# Altium PCB S01-17676 PCBA.PcbDoc
Units mm, origin at the board's own origin, x right, y up, seen from the top; angles counter-clockwise.
Board outline 37.59 x 115.44 mm, 2 copper layers (Top Layer, Bottom Layer); 15 components, 10 nets, 81 pads, 2 vias.
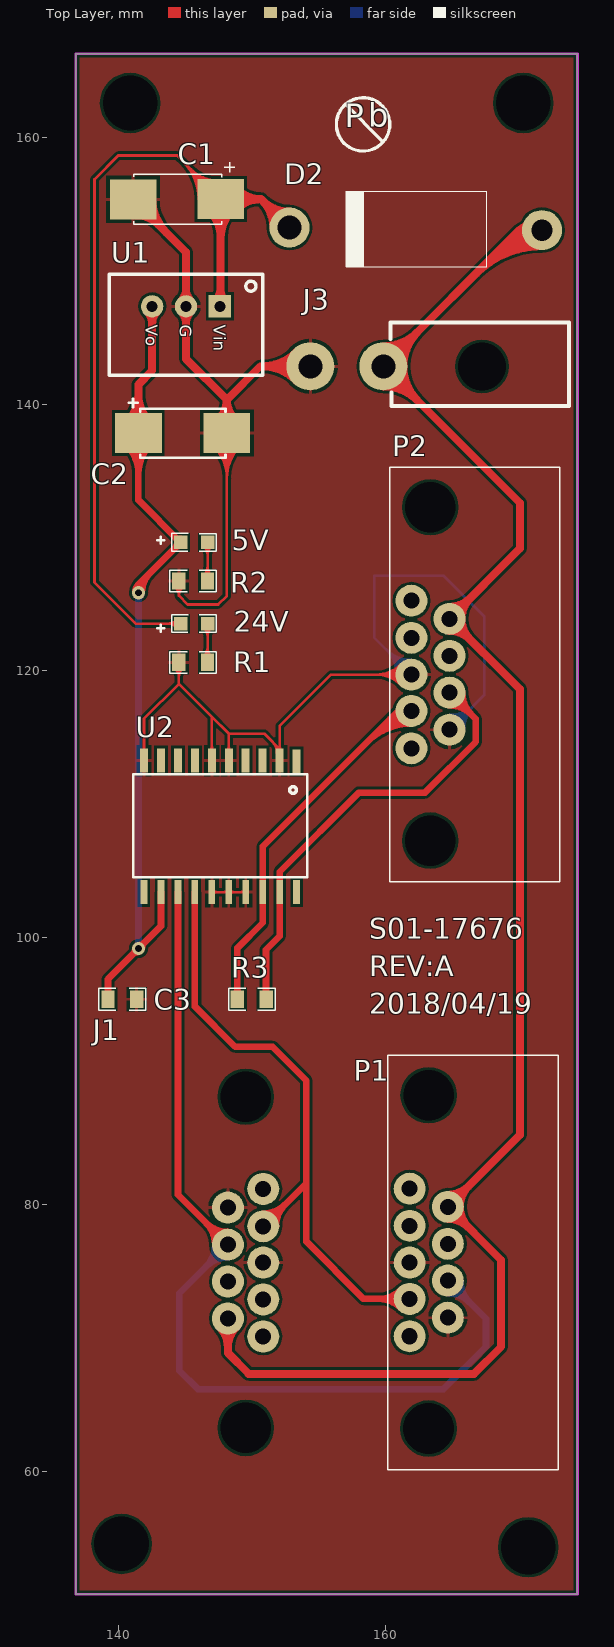
[diagram p0: Top Layer view]
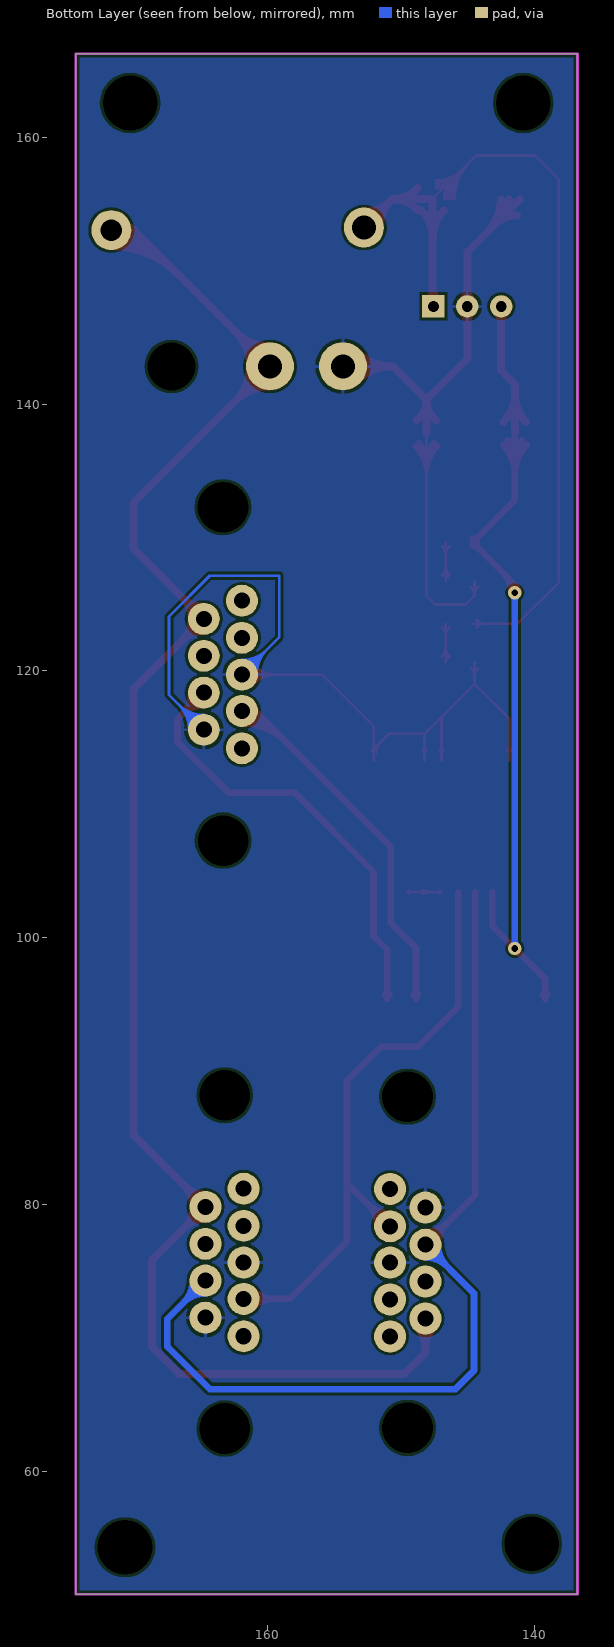
[diagram p1: Bottom Layer view, seen from below]
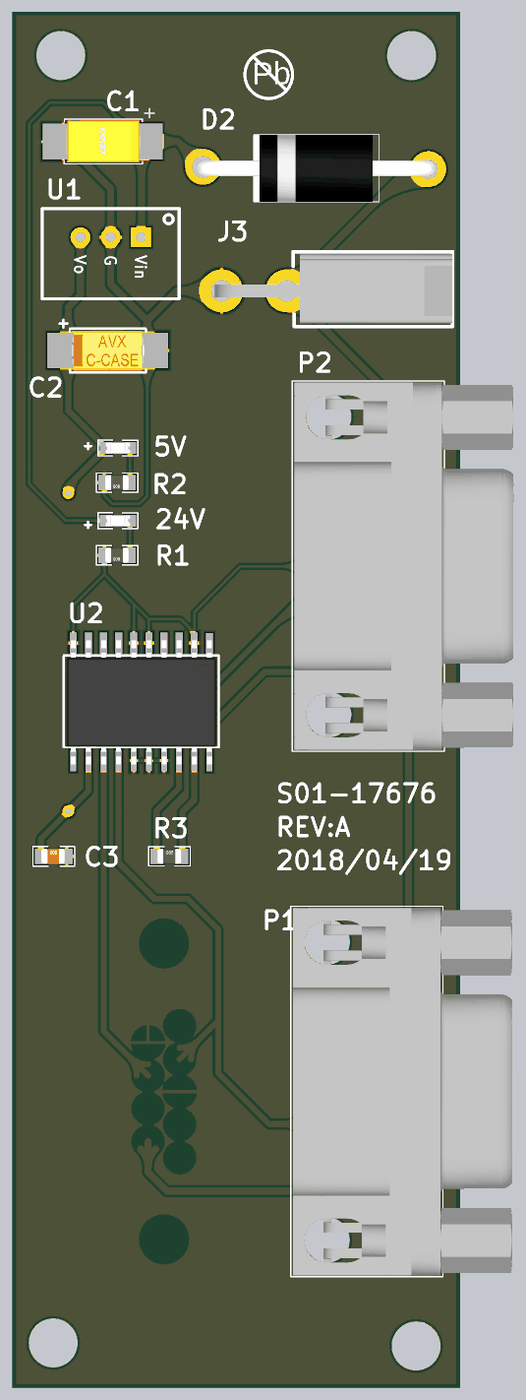
[diagram p2: 3D render of the assembled board from above, using the file's embedded part models]

## Layer stack, top to bottom
Top Solder: solder mask 0.0102, Solder Resist, Dk 3.5
Top Layer: signal copper 0.0356
Dielectric1: dielectric 0.32, FR-4, Dk 4.8
Bottom Layer: signal copper 0.0356
Bottom Solder: solder mask 0.0102, Solder Resist, Dk 3.5

## Board outline
136.779,50.8 136.779,166.243 174.371,166.243 174.371,50.8

## Design rules (kind name [scope] priority, off if disabled: settings)
AssemblyTestPointUsage AssemblyTestPointUsage_1 [All] p2:
AssemblyTestpoint AssemblyTestpoint_1 [All] p2: testpointundercomponent=TRUE minsize=1.016 maxsize=2.54 preferedsize=1.524 minholesize=0 maxholesize=1.016 preferedholesize=0.813 testpointgrid=0.025 usegrid=TRUE gridtolerance=0 allowsidetop=TRUE allowsidebottom=TRUE
Clearance [All] p1: gap=0.2
ComponentClearance ComponentClearance_1 [All] p2: gap=0.254 collisioncheckmode=3 verticalgap=0.254 showdistances=FALSE
DiffPairsRouting DiffPairsRouting_1 [All] p2: maxlimit=0.254 minlimit=0.254 mostfreqgap=0.254 toplayer_minwidth=0.381 toplayer_maxwidth=0.381 toplayer_prefwidth=0.381 bottomlayer_minwidth=0.381 bottomlayer_maxwidth=0.381 bottomlayer_prefwidth=0.381 maxuncoupledlength=12.7
FabricationTestPointUsage TestPointUsage [All] p2: valid=0 allowmultiple=FALSE
FabricationTestpoint Testpoint [All] p2: side=3 testpointundercomponent=TRUE minsize=1.016 maxsize=2.54 preferedsize=1.524 minholesize=0 maxholesize=1.016 preferedholesize=0.813 testpointgrid=0.025 allowsidetop=TRUE allowsidebottom=TRUE usegrid=TRUE gridtolerance=0
FanoutControl Fanout_LCC [IsLCC] p1: bgadir=Out bgaviamode=Centered fanoutstyle=Auto fanoutdirection=Alternating viagrid=0.025 // Fanout_LCC (Default Rule)
FanoutControl Fanout_BGA [IsBGA] p2: bgadir=Out bgaviamode=Centered fanoutstyle=Auto fanoutdirection=Alternating viagrid=0.025 // Fanout_BGA (Default Rule)
FanoutControl Fanout_Small [(CompPinCount < 5)] p3: bgadir=Out bgaviamode=Centered fanoutstyle=Auto fanoutdirection=OutThenIn viagrid=0.025 // Fanout_Small (Default Rule)
FanoutControl Fanout_SOIC [IsSOIC] p4: bgadir=Out bgaviamode=Centered fanoutstyle=Auto fanoutdirection=Alternating viagrid=0.025 // Fanout_SOIC (Default Rule)
FanoutControl Fanout_BGA_1 [IsBGA] p6: bgadir=Out bgaviamode=Centered fanoutstyle=Auto fanoutdirection=Alternating viagrid=0.025 // Fanout_BGA (Default Rule)
FanoutControl Fanout_LCC_1 [IsLCC] p7: bgadir=Out bgaviamode=Centered fanoutstyle=Auto fanoutdirection=Alternating viagrid=0.025 // Fanout_LCC (Default Rule)
FanoutControl Fanout_SOIC_1 [IsSOIC] p8: bgadir=Out bgaviamode=Centered fanoutstyle=Auto fanoutdirection=Alternating viagrid=0.025 // Fanout_SOIC (Default Rule)
FanoutControl Fanout_Small_1 [(CompPinCount < 5)] p9: bgadir=Out bgaviamode=Centered fanoutstyle=Auto fanoutdirection=OutThenIn viagrid=0.025 // Fanout_Small (Default Rule)
FanoutControl Fanout_Default_1 [All] p10: bgadir=Out bgaviamode=Centered fanoutstyle=Auto fanoutdirection=Alternating viagrid=0.025 // Fanout_Default (Default Rule)
Height Height_1 [All] p2: minheight=0 maxheight=25.4 prefheight=12.7
HoleSize [All] p1: absolutevalues=TRUE maxlimit=6 minlimit=0.025 maxpercent=80.000 minpercent=20.000
HoleSize HoleSize_1 [All] p2: absolutevalues=TRUE maxlimit=2.54 minlimit=0.025 maxpercent=80.000 minpercent=20.000
HoleToHoleClearance HoleToHoleClearance_1 [All] p2: gap=0.254 allowstackedmicrovias=TRUE
LayerPairs LayerPairs_1 [All] p2: enforce=TRUE
MinimumSolderMaskSliver MinimumSolderMaskSliver_1 [All] p2: minsoldermaskwidth=0.254
NetAntennae NetAntennae_1 [All] p2: netantennaetolerance=0
PasteMaskExpansion PasteMaskExpansion_1 [All] p2: expansion=0
PlaneClearance PlaneClearance_1 [All] p2: clearance=0.508
PolygonConnect [All] p1: connectstyle=Relief reliefconductorwidth=0.254 reliefentries=4 polygonreliefangle="90 Angle" airgapwidth=0.254
PolygonConnect PolygonConnect_1 [All] p2: connectstyle=Relief reliefconductorwidth=0.254 reliefentries=4 polygonreliefangle="90 Angle" airgapwidth=0.254
RoutingPriority RoutingPriority_1 [All] p2: routingpriority=0
RoutingTopology RoutingTopology_2 [All] p1: topology=Shortest
RoutingTopology [All] p2: topology=Shortest
RoutingTopology RoutingTopology_1 [All] p3: topology=Shortest
RoutingVias [All] p1: holewidth=0.6 width=1 viastyle="Through Hole" minholewidth=0.711 minwidth=1.27 maxholewidth=0.711 maxwidth=1.27
ShortCircuit ShortCircuit_1 [All] p2: allowed=FALSE
SilkToSilkClearance SilkToSilkClearance_1 [All] p2: silktosilkclearance=0.254
SilkToSolderMaskClearance SilkscreenOverComponentPads [IsPad] p2: minsilkscreentomaskgap=0.254 clearancetoexposedcopper=TRUE
SolderMaskExpansion [All] p1: expansion=0.102
SolderMaskExpansion SolderMaskExpansion_1 [All] p2: expansion=0.102
UnRoutedNet UnRoutedNet_1 [All] p2:
Width [All] p1: maxlimit=0.6 minlimit=0.2 preferedwidth=0.3
24 further rules are at their usual default settings.

## Components (designator, comment, footprint, x,y, rotation, side; value= is the part's Value field where it differs from the comment)
5V "0805 LED" "0805 LED" 145.679,129.032 r90 top (schematic designator L2)
24V "0805 LED" "0805 LED" 145.679,122.936 r90 top (schematic designator L1)
C1 "T491D106K035AT" T491D106K035AT 141.224,155.321 r0 top
C2 "T491C226K010AT" T491C226K010AT 141.605,136.144 r0 top
C3 "0.01uF" "0805 Capacitor" 140.208,96.139 r270 top
D2 "SB560" SB560 171.704,153.035 r180 top
J1 "5504F1-09P-02A-03(male)" 5504F1-09P-02A-03 131.572,91.059 r270 top
J3 "39-30-0020" 39-30-0020 162.433,147.955 r270 top
P1 "5504F1-09S-02A-03(female)" 5504F1-09S-02A-03 178.689,60.198 r90 top
P2 "5504F1-09S-02A-03(female)" 5504F1-09S-02A-03 178.816,104.267 r90 top (schematic designator J2)
R1 "3.3K" "0805 Resistor" 145.669,119.888 r90 top
R2 "698" "0805 Resistor" 145.669,125.984 r90 top
R3 "120" "0805 Resistor" 149.86,96.139 r270 top
U1 "ZY7805S-500" ZY78xxS-500 145.034,147.32 r180 top
U2 "AMIS42770ICAW1RG" AMIS42770ICAW1RG 153.67,112.268 r180 top

## Footprints (in the part's own frame and the unit in brackets; to place one, negate y for a bottom-side part, rotate by r counter-clockwise, add the part's x,y. Pads: shape width x height; smd on the part's side, far side on the other; paste and mask are expansions set on the pad)
39-30-0020 [mm] "线至板连接器, 4.2 mm, 2 触点, 针座, Mini-Fit Jr. 5569系列, 通孔安装"
  round 3.6 hole 1.8: 1(5.13,-2.61) 2(5.13,-8.08)
  round 0 hole 3.6: 3(5.14,4.78)
  silkscreen extent 1.85,-2.07 8.12,11.31, body extent 2.05,-8.64 7.85,11.3, height 12.4
"0805 Capacitor" [mm]
  rect 1.3x1 smd: 1(0.75,1.125) 2(0.75,-1.025)
  silkscreen extent -0.08,-1.7 1.58,1.8, body extent 0.12,-1.02 1.37,0.98, height 0.78
"0805 LED" [mm]
  rect 1x1 smd: 1(0.6,1.05) 2(0.6,-0.975)
  silkscreen extent -0.06,-1.63 1.27,1.71, body extent 0.14,-0.98 1.05,1.08, height 0.85
"0805 Resistor" [mm]
  rect 1.3x1 smd: 1(0.75,1.175) 2(0.75,-0.975)
  silkscreen extent -0.06,-1.64 1.56,1.85, body extent 0.13,-0.9 1.38,1.1, height 0.78
5504F1-09P-02A-03 [mm] "连接器, D sub, 堆叠式, 直角, PCB Mount D Sub系列, DE, 插头, 9 触点, 金属主体, 焊接"
  round 2.4 hole 1.2: 1(9.89,19.25) 2(12.69,19.25) 3(15.41,19.25) 4(18.17,19.25) 5(20.95,19.25) 6(11.29,16.6) 7(14.07,16.6) 8(16.83,16.6) 9(19.6,16.6)
  round 0 hole 3.8: 10(2.98,17.94) 11(27.8,17.94)
  body extent 0.01,0.1 30.81,20.98, height 14.27
5504F1-09S-02A-03 [mm] "D-Sub 连接器, 9 触点, 插座, DE, AMPLIMITE HD-20系列, 金属主体, 焊接"
  round 2.4 hole 1.2: 1(9.93,16.89) 2(12.73,16.89) 3(15.45,16.89) 4(18.21,16.89) 5(20.99,16.89) 6(11.32,14.03) 7(14.1,14.03) 8(16.86,14.03) 9(19.63,14.03)
  round 0 hole 3.8: 10(3.01,15.48) 11(28,15.47)
  silkscreen extent -0.07,5.76 31,18.53, body extent 0.05,-0.06 30.85,18.36, height 12.75
AMIS42770ICAW1RG [mm]
  rect 0.6x1.8 smd: 1(0.35,-0.95) 2(1.62,-1) 3(2.89,-1) 4(4.16,-1) 5(5.43,-1) 6(6.7,-1) 7(7.97,-1) 8(9.24,-1) 9(10.51,-1) 10(11.78,-1)
  rect 0.5x1.8 smd: 11(11.79,8.85) 12(10.51,8.85) 13(9.24,8.85) 14(7.97,8.85) 15(6.7,8.85) 16(5.43,8.85) 17(4.16,8.85) 18(2.89,8.85) 19(1.61,8.85) 20(0.35,8.85)
  silkscreen extent -0.44,0.03 12.58,7.73, body extent -0.23,-1.24 12.37,9.16, height 2.6
SB560 [mm] "肖特基整流器, 60 V, 5 A, 单, DO-201AD, 2 引脚, 670 mV"
  round 3 hole 1.6: 1(-0.01,0)
  round 3 hole 1.8: 2(18.92,-0.19)
  silkscreen extent 4.12,-2.92 14.67,2.74, body extent -0.66,-2.89 19.48,2.75, height 7.82
T491C226K010AT [mm] "表面贴装钽电容, 22 μF, 10 V, T491 系列, ± 10%, 2312 [6032 公制]"
  rect 3.5x3 smd: 1(-0.14,1.67) 2(6.49,1.68)
  silkscreen extent -0.86,-0.16 6.39,4.26, body extent 0.14,-0.01 6.24,3.34, height 2.7
T491D106K035AT [mm]
  rect 3.5x3 smd: 1(6.41,0.04) 2(-0.15,0.02)
  silkscreen extent -0.1,-1.86 7.47,2.81, body extent 0.03,-1.71 6.33,1.79, height 2.81
ZY78xxS-500 [mil]
  rect 66x66 hole 32: 1(-100,0)
  round 66 hole 32: 2(0,0) 3(100,0)
  silkscreen extent -227,-94 226,203

## Part data
C1: "表面贴装钽电容, 10 μF, 35 V, T491 系列, ± 10%, 2917 [7343 公制]"
C2: "表面贴装钽电容, 22 μF, 10 V, T491 系列, ± 10%, 2312 [6032 公"
C3: library part "0805 Capacitor"
D2: "肖特基二极管与整流器 5a/60V"
J1: library part 5504F1-09P-02A-03, "连接器, D sub, 堆叠式, 直角, PCB Mount D Sub系列, DE, 插头, 9 触点, 金属主体, 焊接"
J3: "线至板连接器, 4.2 mm, 2 触点, 针座, Mini-Fit Jr. 5569系列, 通孔安装"
P1 P2: library part 5504F1-09S-02A-03, "D-Sub 连接器, 9 触点, 插座, DE, AMPLIMITE HD-20系列, 金属主体, 焊接"
R1 R2 R3: library part "0805 Resistor"
U1: library part ZY78xxS-500
U2: "CAN REPEATER"

## Free pads (board coordinates)
  round 1.8 hole 4.1: 51(170.685,54.312) 52(140.205,54.566) 53(140.843,162.56) 54(170.307,162.56)

## Via types
v1: diameter 1, hole 0.5, Top Layer to Bottom Layer, 2 vias

## Nets (pads, with @x,y where several pads share a name; then routed paths per layer and width w, separated by ;. In a path a pad name is that pad's centre, name@x,y a point inside that pad or via, vN(x,y) a via of type N, cw(c..) or ccw(c..) an arc to the next point about the centre after c; other vN are vias at no path point)
CANGND: C1.2 C2.2 C3.1 J1.3 J1.6 J3.2 P1.3 P1.6 P2.3 P2.6 R1.1 R2.1 U1.2 U2.2 U2.5 U2.6 U2.10 U2.15 U2.16 U2.17 | length 198.5
  Top Layer w0.2: U2.10@141.749,114.009 ccw(c141.407,114.351) 141.89,114.351 ccw(c142.373,114.351) U2.10@142.031,114.009 ; U2.10 141.89,116.427 144.494,119.031 ; R1.1@144.211,120.205 cw(c143.528,119.522) 144.494,119.522 cw(c145.46,119.522) R1.1@144.777,120.205 ; R2.1@144.215,126.298 cw(c143.568,125.635) 144.494,125.635 ; R1.1 144.494,119.031 ; R2.1 144.494,125.635 ; R2.1@144.773,126.298 ccw(c145.42,125.635) 144.494,125.635 ; U2.6@146.829,114.009 ccw(c146.487,114.351) 146.97,114.351 ccw(c147.453,114.351) U2.6@147.111,114.009 ; U2.15 U2.16 U2.17 ; U2.6 146.97,116.555 ; U2.15@147.076,103.312 cw(c147.332,103.056) 147.332,103.418 cw(c147.332,103.78) U2.15@147.076,103.524 ; C2.2@147.105,136.834 cw(c144.715,134.444) 148.095,134.444 cw(c151.475,134.444) C2.2@149.085,136.834 ; C2.2@147.246,136.975 cw(c145.198,134.927) 148.095,134.927 cw(c150.992,134.927) C2.2@148.944,136.975 ; C2.2@147.388,137.117 cw(c145.681,135.41) 148.095,135.41 cw(c150.509,135.41) C2.2@148.802,137.117 ; C2.2@147.529,137.258 cw(c146.164,135.893) 148.095,135.893 cw(c150.026,135.893) C2.2@148.661,137.258 ; C2.2 148.095,125.616 147.447,124.968 145.161,124.968 144.494,125.635 ; U2.5@148.099,114.009 ccw(c147.757,114.351) 148.24,114.351 ccw(c148.723,114.351) U2.5@148.381,114.009 ; U2.16@148.134,103.312 ccw(c147.878,103.056) 147.878,103.418 ccw(c147.878,103.78) U2.16@148.134,103.524 ; U2.5 148.24,115.285 ; U2.16@148.346,103.312 cw(c148.602,103.056) 148.602,103.418 cw(c148.602,103.78) U2.16@148.346,103.524 ; U2.17@149.404,103.312 ccw(c149.148,103.056) 149.148,103.418 ccw(c149.148,103.78) U2.17@149.404,103.524 ; 151.515,114.677 cw(c150.706,113.868) U2.2@151.85,113.868 ; 151.856,114.336 cw(c151.389,113.868) U2.2@152.05,113.868 ; U2.2@151.909,114.009 ccw(c151.567,114.351) 152.05,114.351 ccw(c152.533,114.351) U2.2@152.191,114.009 ; U2.2 U2.2@152.05,114.142 ; P2.3@161.148,118.939 ccw(c159.27,117.061) 159.27,119.717 ccw(c159.27,122.373) P2.3@161.148,120.495 ; P2.3@161.29,119.081 ccw(c159.753,117.544) 159.753,119.717 ccw(c159.753,121.89) P2.3@161.29,120.353 ; P2.3@161.431,119.222 ccw(c160.236,118.027) 160.236,119.717 ccw(c160.236,121.407) P2.3@161.431,120.212 ; P2.3@161.572,119.363 ccw(c160.719,118.51) 160.719,119.717 ccw(c160.719,120.924) P2.3@161.572,120.071 ; P2.3 155.912,119.717 152.05,115.855 U2.2@152.05,114.142 ; 144.494,119.031 146.97,116.555 ; 146.97,116.555 148.24,115.285 ; 148.24,115.285 150.907,115.285 U2.2@152.05,114.142
  Top Layer w0.6: C1.2 145.034,151.381 U1.2 145.034,143.383 148.095,140.322 ; C1.2@141.324,154.141 cw(c141.324,151.847) 142.946,153.469 ; C1.2@141.924,155.341 ccw(c143.976,155.341) C1.2@142.525,153.89 ; C1.2@142.524,155.341 ccw(c146.025,155.341) 143.549,152.866 ; U1.2@144.653,146.939 cw(c143.735,146.021) 145.034,146.021 cw(c146.333,146.021) U1.2@145.415,146.939 ; U1.2@144.653,147.701 ccw(c143.735,148.619) 145.034,148.619 ccw(c146.333,148.619) U1.2@145.415,147.701 ; C2.2@147.345,138.761 ccw(c146.095,140.322) 148.095,140.322 ; C2.2 148.095,140.322 ; C2.2@148.845,138.761 cw(c150.095,140.322) 148.095,140.322 ; J3.2@153.292,141.764 ccw(c150.732,139.204) 150.732,142.825 ccw(c150.732,146.446) J3.2@153.292,143.886 ; J3.2@153.717,142.189 ccw(c152.18,140.652) 152.18,142.825 ccw(c152.18,144.998) J3.2@153.717,143.461 ; J3.2 150.598,142.825 148.095,140.322
  Bottom Layer w0.2: P2.3@160.826,119.717 ccw(c158.17,119.717) 160.048,121.595 ccw(c161.926,123.473) P2.3@161.926,120.817 ; P2.3@161.026,119.717 ccw(c158.853,119.717) 160.39,121.253 ccw(c161.926,122.79) P2.3@161.926,120.617 ; P2.3@161.226,119.717 ccw(c159.536,119.717) 160.731,120.912 ccw(c161.926,122.107) P2.3@161.926,120.417 ; P2.3@161.426,119.717 ccw(c160.219,119.717) 161.072,120.571 ccw(c161.926,121.424) P2.3@161.926,120.217 ; P2.3 159.131,122.512 159.131,127.127 164.338,127.127 167.386,124.079 167.386,118.187 P2.6 ; P2.6@164.786,116.087 ccw(c164.786,117.294) 165.64,116.441 ccw(c166.493,115.587) P2.6@165.286,115.587 ; P2.6@164.786,116.287 ccw(c164.786,117.977) 165.981,116.782 ccw(c167.176,115.587) P2.6@165.486,115.587 ; P2.6@164.786,116.487 ccw(c164.786,118.66) 166.322,117.123 ccw(c167.859,115.587) P2.6@165.686,115.587 ; P2.6@164.786,116.687 ccw(c164.786,119.343) 166.664,117.465 ccw(c168.542,115.587) P2.6@165.886,115.587
CANV+: D2.1 J1.9 J3.1 P1.9 P2.9 | length 178.4
  Top Layer w0.6: J1.9@147.536,70.823 cw(c145.999,69.286) 148.172,69.286 cw(c150.345,69.286) J1.9@148.808,70.823 ; J1.9 148.172,68.871 149.733,67.31 166.624,67.31 168.656,69.342 168.656,75.831 P1.9 170.053,85.222 170.053,118.63 P2.9 170.053,129.164 170.053,132.595 J3.1 170.033,153.035 ; J3.1@159.823,141.325 cw(c159.823,137.704) 162.384,140.264 cw(c164.944,142.825) 161.323,142.825 cw(c164.944,142.825) 162.384,145.386 cw(c159.823,147.946) J3.1@159.823,144.325 ; J3.1@159.823,141.925 cw(c159.823,139.752) 161.359,141.289 cw(c162.896,142.825) 160.723,142.825 cw(c162.896,142.825) 161.359,144.361 cw(c159.823,145.898) J3.1@159.823,143.725 ; P1.9@164.659,78.928 cw(c164.659,76.755) 166.195,78.292 cw(c167.732,79.828) 165.559,79.828 cw(c167.732,79.828) 166.195,81.364 cw(c164.659,82.901) P1.9@164.659,80.728 ; P2.9@164.786,122.997 cw(c164.786,120.824) 166.322,122.361 cw(c167.859,123.897) 165.686,123.897 cw(c167.859,123.897) 166.322,125.433 cw(c164.786,126.97) P2.9@164.786,124.797 ; 166.796,149.798 cw(c171.714,144.88) D2.1@171.714,151.835 ; 167.82,150.822 cw(c171.714,146.928) D2.1@171.714,152.435 ; 168.844,151.846 cw(c171.714,148.977) D2.1 170.033,153.035 ; 169.869,152.871 cw(c171.714,151.025) D2.1@171.714,153.635 ; D2.1@170.579,152.645 ccw(c170.033,152.458) 170.033,153.035 ; D2.1@170.579,153.425 cw(c170.033,153.612) 170.033,153.035
NetC1_1: 24V.1 C1.1 D2.2 U1.1 | length 98.8
  Top Layer w0.2: 24V.1@144.346,123.253 ccw(c143.663,122.57) 143.663,123.536 ccw(c143.663,124.502) 24V.1@144.346,123.819 ; 24V.1 141.259,123.536 138.176,126.619 138.176,156.845 139.954,158.623 144.372,158.623 C1.1 ; 144.817,158.178 cw(c142.001,155.361) C1.1@145.984,155.361 ; 145.159,157.836 cw(c142.683,155.361) C1.1@146.184,155.361 ; 145.421,157.574 ccw(c147.384,159.537) C1.1@147.384,156.761 ; 145.5,157.495 cw(c143.366,155.361) C1.1@146.384,155.361 ; 145.762,157.233 ccw(c147.384,158.855) C1.1@147.384,156.561 ; 145.842,157.153 cw(c144.049,155.361) C1.1@146.584,155.361 ; 146.104,156.891 ccw(c147.384,158.172) C1.1@147.384,156.361 ; C1.1@146.183,156.812 cw(c144.732,155.361) C1.1@146.784,155.361 ; C1.1@146.445,156.55 ccw(c147.384,157.489) C1.1@147.384,156.161
  Top Layer w0.6: C1.1@146.785,154.512 cw(c144.737,152.464) 147.634,152.464 cw(c150.531,152.464) C1.1@148.483,154.512 ; U1.1@147.193,147.701 ccw(c146.13,148.764) 147.634,148.764 ; U1.1@147.634,147.32 C1.1 150.648,155.361 ; 147.634,148.474 ccw(c148.728,148.474) U1.1@147.955,147.701 ; C1.1@148.761,154.542 cw(c150.648,152.778) 150.648,155.361 ; C1.1@148.761,156.18 ccw(c150.648,157.944) 150.648,155.361 ; D2.2@151.584,153.225 ccw(c148.687,153.225) 150.735,155.274 ccw(c152.784,157.322) D2.2@152.784,154.425 ; D2.2 150.648,155.361
NetJ1_2: J1.2 P1.2 U2.14 | length 52.6
  Top Layer w0.5: U2.14 145.7,94.838 148.717,91.821 151.511,91.821 154.051,89.281 154.051,81.598 ; J1.2 154.051,81.598 ; J1.2@150.822,79.319 ccw(c150.822,81.613) 152.444,79.991 ccw(c154.066,78.369) J1.2@151.772,78.369 ; P1.2@161.127,72.256 ccw(c159.505,70.634) 159.505,72.928 ccw(c159.505,75.222) P1.2@161.127,73.6 ; P1.2 158.339,72.928 154.051,77.216 154.051,81.598
NetJ1_7: J1.7 P1.7 U2.13 | length 80.7
  Top Layer w0.5: U2.13 144.43,80.731 J1.7 ; J1.7@147.222,76.989 ccw(c144.928,76.989) 146.55,78.611 ccw(c148.172,80.233) J1.7@148.172,77.939
  Bottom Layer w0.5: J1.7@147.222,76.989 cw(c144.928,76.989) 146.55,75.367 cw(c148.172,73.745) J1.7@148.172,76.039 ; J1.7 144.526,73.343 144.526,67.564 145.923,66.167 164.338,66.167 167.513,69.342 167.513,71.444 P1.7 ; P1.7@164.659,73.348 cw(c164.659,71.054) 166.281,72.676 cw(c167.903,74.298) P1.7@165.609,74.298
NetJ2_2: P2.2 R3.2 U2.18 | length 36.7
  Top Layer w0.5: R3.2@148.708,95.716 ccw(c148.281,96.143) 148.885,96.143 ccw(c149.489,96.143) R3.2@149.062,95.716 ; R3.2 148.885,99.228 150.78,101.123 U2.18 150.78,106.838 160.939,116.997 P2.2 ; 158.619,114.677 cw(c161.926,111.371) P2.2@161.926,116.047 ; 159.473,115.531 cw(c161.926,113.078) P2.2@161.926,116.547 ; 160.326,116.384 cw(c161.926,114.785) P2.2@161.926,117.047
NetJ2_7: P2.7 R3.1 U2.19 | length 37.8
  Top Layer w0.5: R3.1@150.858,95.716 ccw(c150.431,96.143) 151.035,96.143 ccw(c151.639,96.143) R3.1@151.212,95.716 ; R3.1 151.035,99.092 152.06,100.117 U2.19 152.06,104.943 157.988,110.871 162.941,110.871 166.751,114.681 166.751,116.402 P2.7 ; P2.7@164.786,117.417 cw(c164.786,115.123) 166.408,116.745 cw(c168.03,118.367) P2.7@165.736,118.367
NetL1_2: 24V.2 R1.2 | length 6.3
  Top Layer w0.2: R1.2@146.361,121.071 ccw(c145.654,121.778) 146.654,121.778 ; 24V.2@146.371,123.253 cw(c145.688,122.57) 146.654,122.57 cw(c147.62,122.57) 24V.2@146.937,123.253 ; R1.2@146.503,120.929 ccw(c146.137,121.295) 146.654,121.295 ; R1.2@146.654,120.648 24V.2 ; 146.654,121.73 ccw(c147.586,121.73) R1.2@146.927,121.071
NetL2_2: 5V.2 R2.2 | length 6.3
  Top Layer w0.2: R2.2@146.361,127.167 ccw(c145.654,127.874) 146.654,127.874 ; 5V.2@146.371,129.349 cw(c145.688,128.666) 146.654,128.666 cw(c147.62,128.666) 5V.2@146.937,129.349 ; R2.2@146.503,127.025 ccw(c146.137,127.391) 146.654,127.391 ; R2.2 146.654,126.744 5V.2 ; 146.654,127.826 ccw(c147.586,127.826) R2.2@146.927,127.167
VCC5: 5V.1 C2.1 C3.2 U1.3 U2.12 | length 85
  Top Layer w0.5: C3.2@139.006,95.716 ccw(c138.579,96.143) 139.183,96.143 ccw(c139.787,96.143) C3.2@139.36,95.716 ; C3.2 139.183,96.892 v1(141.478,99.187) 143.16,100.869 U2.12 ; C2.1@140.581,136.93 cw(c138.447,134.796) 141.465,134.796 cw(c144.483,134.796) C2.1@142.349,136.93 ; C2.1@140.935,137.284 cw(c139.654,136.003) 141.465,136.003 cw(c143.276,136.003) C2.1@141.995,137.284 ; v1@141.228,99.187 cw(c140.624,99.187) 141.051,98.76 cw(c141.478,98.333) v1@141.478,98.937 ; v1@141.228,125.857 cw(c142.131,125.857) 141.492,126.495 ; v1@141.301,126.034 ccw(c140.874,126.461) 141.478,126.461 ccw(c142.082,126.461) v1@141.655,126.034 ; C2.1 141.465,132.796 5V.1 141.478,126.481 v1(141.478,125.857) ; v1@141.478,99.437 ccw(c141.478,100.041) 141.905,99.614 ccw(c142.332,99.187) v1@141.728,99.187 ; v1@141.728,125.857 cw(c143.838,125.857) 142.346,127.349 ; 5V.1@144.629,129.382 ccw(c144.629,128.778) 144.202,129.205 ccw(c143.775,129.632) 144.379,129.632 ccw(c143.775,129.632) 144.202,130.059 ccw(c144.629,130.486) 5V.1@144.629,129.882
  Top Layer w0.6: C2.1@140.616,138.663 ccw(c138.568,140.711) 141.465,140.711 ccw(c144.362,140.711) C2.1@142.314,138.663 ; C2.1 141.465,141.465 142.494,142.494 U1.3 ; U1.3@142.113,146.939 cw(c141.195,146.021) 142.494,146.021 cw(c143.793,146.021) U1.3@142.875,146.939
  Bottom Layer w0.5: v1@141.301,99.364 ccw(c140.874,99.791) 141.478,99.791 ccw(c142.082,99.791) v1@141.655,99.364 ; v1@141.301,125.68 cw(c140.874,125.253) 141.478,125.253 cw(c142.082,125.253) v1@141.655,125.68 ; v1(141.478,99.187) v1(141.478,125.857)
pads on no net: J1.1 J1.4 J1.5 J1.8 J1.10 J1.11 J3.3 P1.1 P1.4 P1.5 P1.8 P1.10 P1.11 P2.1 P2.4 P2.5 P2.8 P2.10 P2.11 U2.1 U2.3 U2.4 U2.7 U2.8 U2.9 U2.11 U2.20

## Polygon pours and split planes (outlines as drawn)
CANGND on Top Layer "GND1" (solid, pour order 2): 136.779,166.243 174.371,166.243 174.371,50.8 136.779,50.8 136.779,166.243
CANGND on Bottom Layer "GND2" (solid, pour order 3): 136.779,166.243 174.371,166.243 174.371,50.8 136.779,50.8 136.779,165.989 136.906,166.116 136.779,166.243

## Keep-outs
Keep-Out Layer:
  the board outline again, w0.2

## Silkscreen, mask and mechanical layers (free items; w line width, h text height)
Top Overlay:
  circle w0.254: c158.305,160.959 r2
  lines w0.2: 142.875,123.19 143.383,123.19 ; 142.875,129.794 143.383,129.794 ; 143.129,122.936 143.129,123.444 ; 143.129,129.54 143.129,130.048
  lines w0.254: 156.982,162.488 159.742,159.679
  text "b" at 158.683,160.179 h3
  text "P" at 156.913,160.159 h3
  text "S01-17676" at 158.759,99.934 h1.52
  text "REV:A" at 158.759,97.114 h1.52
  text "2018/04/19" at 158.759,94.314 h1.52
Mechanical 16:
  drawing of 1873 lines, arcs and shapes, not listed
  text "1" at 36.246,189.611 h1.78
  text "2" at 108.89,189.611 h1.78
  text "3" at 182.042,189.611 h1.78
  text "4" at 254.94,189.611 h1.78
  text "A" at 1.905,166.599 h1.78
  text "A" at 288.925,166.599 h1.78
  text "B" at 1.905,118.542 h1.78
  text "B" at 288.925,118.542 h1.78
  text "C" at 1.905,70.028 h1.78
  text "ENGINEER:" at 173.99,33.02 h1.14
  text "TITLE:" at 212.09,33.02 h1.14
  text "PCB DESIGNER:" at 173.99,25.527 h1.14
  text "D" at 1.905,22.022 h1.78
  text "D" at 288.925,22.022 h1.78
  text "DATE:" at 173.99,17.78 h1.14
  text "PART NO.:" at 212.09,17.78 h1.14
  text "REV:" at 265.43,17.78 h1.14
  text "Altium Limited" at 140.97,15.24 h1.78
  text ".PRINT_DATE" at 175.26,14.732 h1.78
  text "12a Rodborough Rd" at 140.97,12.7 h1.78
  text "Frenchs Forest" at 140.97,10.16 h1.78
  text "FILE NAME:" at 173.99,10.16 h1.14
  text "DWG NO:" at 212.09,10.16 h1.14
  text "SCALE:" at 265.43,10.16 h1.14
  text "NSW 2086" at 140.97,7.62 h1.78
  text ".PCB_FILE_NAME_NO_PATH" at 175.26,7.112 h1.78
  text "1" at 36.246,1.651 h1.78
  text "2" at 108.89,1.651 h1.78
  text "3" at 182.042,1.651 h1.78
  text "4" at 254.94,1.651 h1.78

## Text inside footprints (layer, text, board x,y; h text height)
U1: Top Overlay "Vo" at 142.024,145.923 h0.91 r270; Top Overlay "G" at 144.564,145.923 h0.91 r270; Top Overlay "Vin" at 147.104,145.923 h0.91 r270